# Altium PCB PWM_Controller_Half_Bridge_ONLY_TL494.PcbDoc
Units mm, origin at the board's own origin, x right, y up, seen from the top; angles counter-clockwise.
Board outline 55.25 x 27.25 mm, 2 copper layers (Top Layer, Bottom Layer), stack 1.071 mm thick; 44 components, 18 nets, 105 pads, 17 vias.
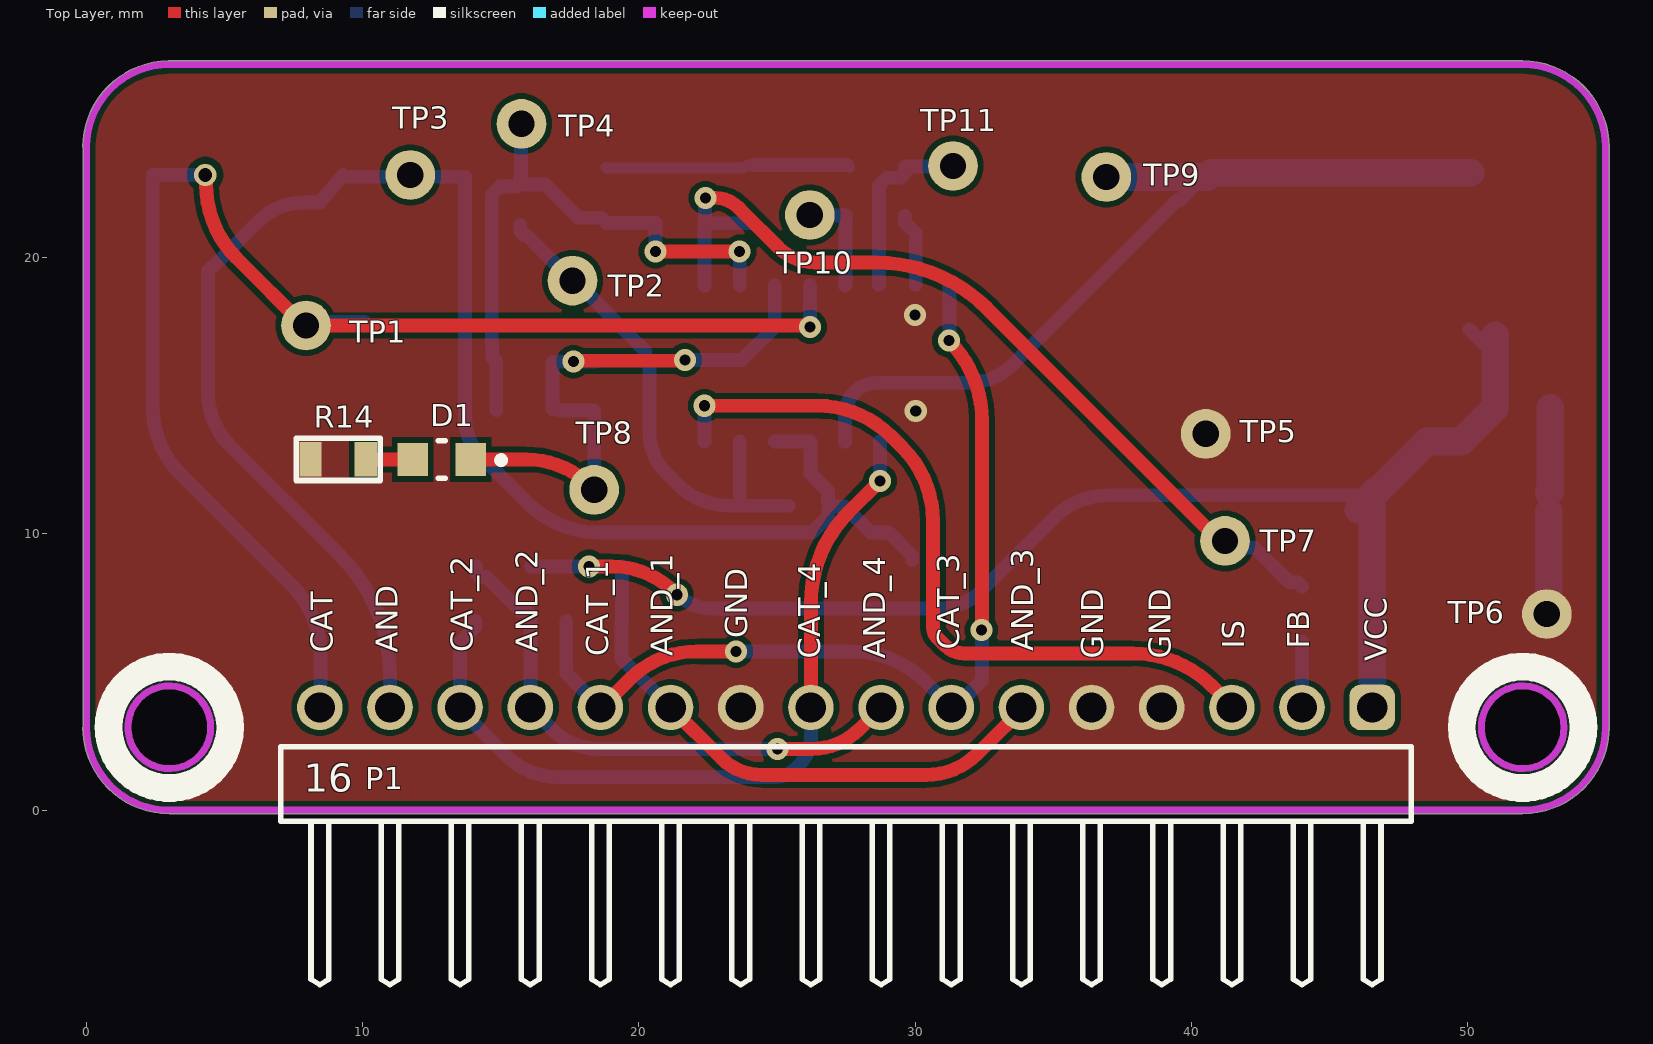
[diagram p0: Top Layer view]
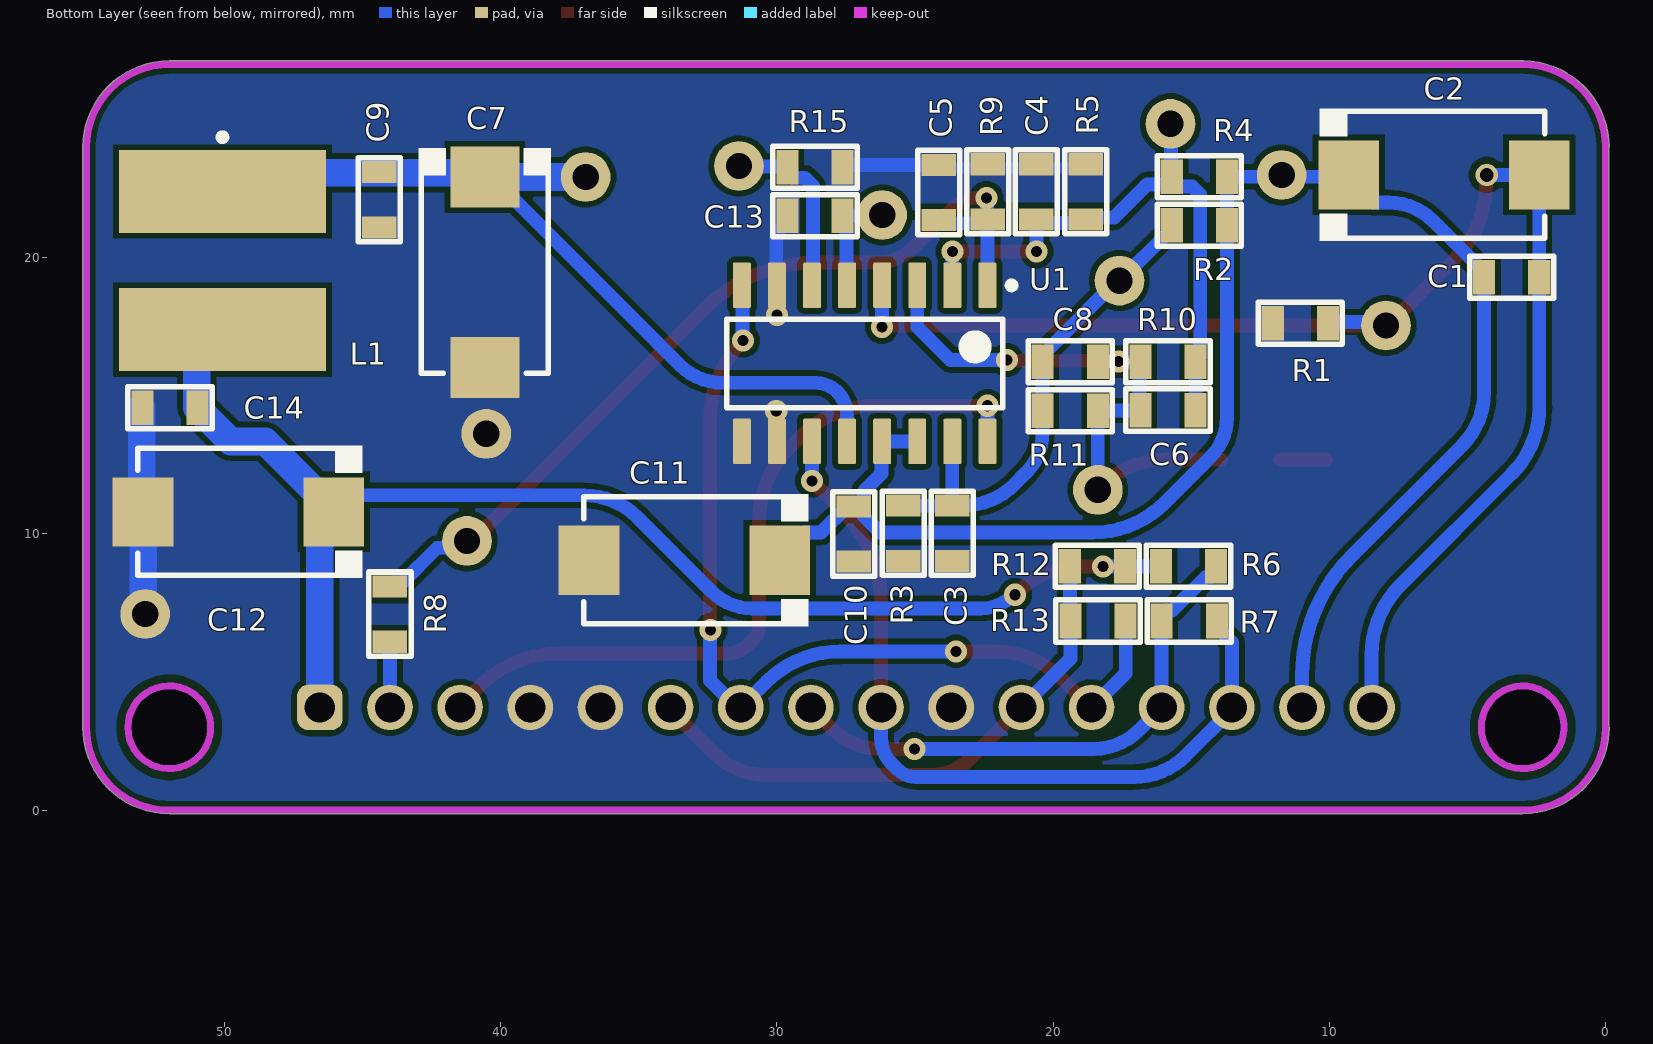
[diagram p1: Bottom Layer view, seen from below]
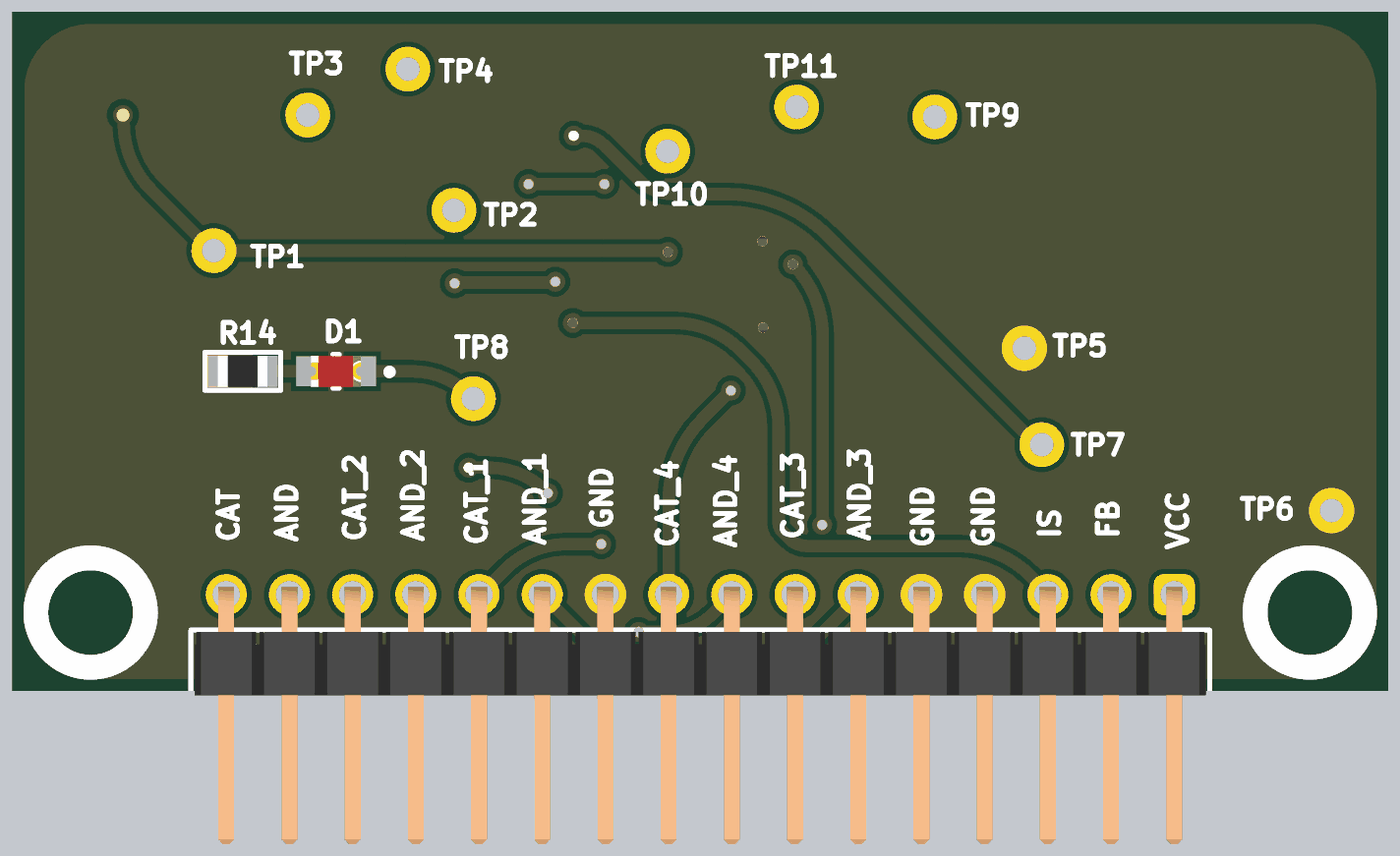
[diagram p2: 3D render of the assembled board from above, using the file's embedded part models]
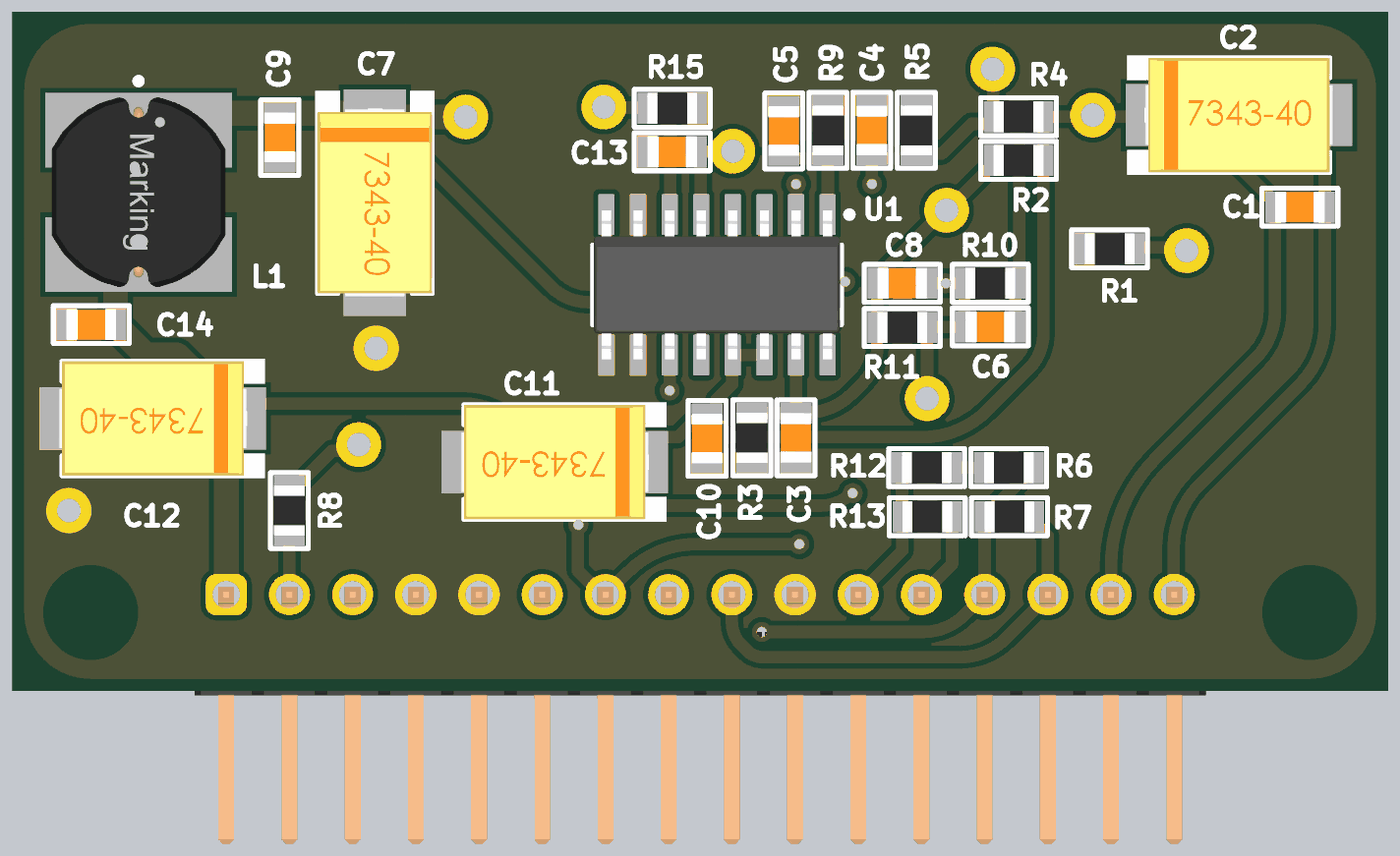
[diagram p3: 3D render of the assembled board from below, using the file's embedded part models]

## Layer stack, top to bottom
Top Solder: solder mask 0.0102, Solder Resist, Dk 3.5
Top Layer: signal copper 0.0356
Dielectric 1: dielectric 1, FR-4, Dk 4.8
Bottom Layer: signal copper 0.0356
Bottom Solder: solder mask 0.0102, Solder Resist, Dk 3.5

## Board outline
-0.122,3.038 -0.122,23.962 -0.127,24 cw(c3,24) 2.954,27.127 2.963,27.127 52,27.127 cw(c52,24) 55.127,24.001 55.127,24 55.127,3.05 55.127,3 cw(c52,3) 52.002,-0.127 52,-0.127 2.999,-0.127 2.997,-0.127 cw(c3,3)
cut-out: 50.5,3 ccw(c52,3) 52,1.5 ccw(c52,3) 53.5,3 ccw(c52,3) 52,4.5 ccw(c52,3)
cut-out: 1.5,3 ccw(c3,3) 3,1.5 ccw(c3,3) 4.5,3 ccw(c3,3) 3,4.5 ccw(c3,3)

## Design rules (kind name [scope] priority, off if disabled: settings)
Clearance Clearance_1 [All vs InNet('GND_1')] p1: gap=0.2 ignorepadtopadclearanceinfootprint=FALSE
Clearance [All vs InNet('GND')] p2: gap=0.2 ignorepadtopadclearanceinfootprint=FALSE except(0.4: Fill-Fill Fill-Poly Fill-Region Fill-Text Fill-Hole Poly-Poly Poly-Region Poly-Text Poly-Hole Region-Region Region-Text Region-Hole)
ComponentClearance [All] p1: gap=-3 collisioncheckmode=3 verticalgap=0.254 showdistances=FALSE
DiffPairsRouting [All] p1: maxlimit=0.254 minlimit=0.254 mostfreqgap=0.254 substack1={A23D90DD-733B-49C5-8102-56B3D284E3A0} toplayer_{a23d90dd-733b-49c5-8102-56b3d284e3a0}_minwidth=0.381 toplayer_{a23d90dd-733b-49c5-8102-56b3d284e3a0}_maxwidth=0.381 toplayer_{a23d90dd-733b-49c5-8102-56b3d284e3a0}_prefwidth=0.381 bottomlayer_{a23d90dd-733b-49c5-8102-56b3d284e3a0}_minwidth=0.381 bottomlayer_{a23d90dd-733b-49c5-8102-56b3d284e3a0}_maxwidth=0.381 bottomlayer_{a23d90dd-733b-49c5-8102-56b3d284e3a0}_prefwidth=0.381 toplayer_minwidth=0.381 toplayer_maxwidth=0.381 toplayer_prefwidth=0.381 bottomlayer_minwidth=0.381 bottomlayer_maxwidth=0.381 bottomlayer_prefwidth=0.381 substack2={0B3DB408-A969-412D-8C07-BA8AE97219D9} toplayer_{0b3db408-a969-412d-8c07-ba8ae97219d9}_minwidth=0.381 toplayer_{0b3db408-a969-412d-8c07-ba8ae97219d9}_maxwidth=0.381 toplayer_{0b3db408-a969-412d-8c07-ba8ae97219d9}_prefwidth=0.381 bottomlayer_{0b3db408-a969-412d-8c07-ba8ae97219d9}_minwidth=0.381 bottomlayer_{0b3db408-a969-412d-8c07-ba8ae97219d9}_maxwidth=0.381 bottomlayer_{0b3db408-a969-412d-8c07-ba8ae97219d9}_prefwidth=0.381 substack3={378827E6-B38F-4565-9D2F-710D8D441C30} toplayer_{378827e6-b38f-4565-9d2f-710d8d441c30}_minwidth=0.381 toplayer_{378827e6-b38f-4565-9d2f-710d8d441c30}_maxwidth=0.381 toplayer_{378827e6-b38f-4565-9d2f-710d8d441c30}_prefwidth=0.381 bottomlayer_{378827e6-b38f-4565-9d2f-710d8d441c30}_minwidth=0.381 bottomlayer_{378827e6-b38f-4565-9d2f-710d8d441c30}_maxwidth=0.381 bottomlayer_{378827e6-b38f-4565-9d2f-710d8d441c30}_prefwidth=0.381 substack4={1E65D4A7-266F-4925-B814-5E9C4A66F8EE} toplayer_{1e65d4a7-266f-4925-b814-5e9c4a66f8ee}_minwidth=0.381 toplayer_{1e65d4a7-266f-4925-b814-5e9c4a66f8ee}_maxwidth=0.381 toplayer_{1e65d4a7-266f-4925-b814-5e9c4a66f8ee}_prefwidth=0.381 bottomlayer_{1e65d4a7-266f-4925-b814-5e9c4a66f8ee}_minwidth=0.381 bottomlayer_{1e65d4a7-266f-4925-b814-5e9c4a66f8ee}_maxwidth=0.381 bottomlayer_{1e65d4a7-266f-4925-b814-5e9c4a66f8ee}_prefwidth=0.381 substack5={93C5D03E-862D-45F8-9871-970EEA9B3F11} toplayer_{93c5d03e-862d-45f8-9871-970eea9b3f11}_minwidth=0.381 toplayer_{93c5d03e-862d-45f8-9871-970eea9b3f11}_maxwidth=0.381 toplayer_{93c5d03e-862d-45f8-9871-970eea9b3f11}_prefwidth=0.381 bottomlayer_{93c5d03e-862d-45f8-9871-970eea9b3f11}_minwidth=0.381 bottomlayer_{93c5d03e-862d-45f8-9871-970eea9b3f11}_maxwidth=0.381 bottomlayer_{93c5d03e-862d-45f8-9871-970eea9b3f11}_prefwidth=0.381 maxuncoupledlength=12.7
Height [All] p1: minheight=0 maxheight=50 prefheight=33
HoleSize [All] p1: absolutevalues=TRUE maxlimit=6 minlimit=0.01 maxpercent=80.000 minpercent=20.000
HoleToHoleClearance [All] p1: gap=0.1 allowstackedmicrovias=TRUE
MinimumSolderMaskSliver [All] p1: minsoldermaskwidth=0.1
PlaneClearance [All] p1: clearance=0.7
PlaneConnect [All] p1: planeconnectstyle=Direct reliefexpansion=0.5 reliefentries=4 reliefconductorwidth=0.5 reliefairgap=0.15
PolygonConnect VQFN20 [HasFootprint('VQFN20')] p1: connectstyle=Direct reliefconductorwidth=0.254 reliefentries=4 polygonreliefangle="90 Angle" airgapwidth=0.254
PolygonConnect [All] p2: connectstyle=Direct reliefconductorwidth=0.3 reliefentries=4 polygonreliefangle="90 Angle" airgapwidth=0.15
RoutingVias [All] p1: holewidth=0.1 width=0.1 viastyle="Through Hole" minholewidth=0 minwidth=0.3 maxholewidth=2 maxwidth=4
ShortCircuit [All] p1: allowed=TRUE
SilkToSolderMaskClearance [IsPad] p1: minsilkscreentomaskgap=0.1 clearancetoexposedcopper=TRUE
SolderMaskExpansion SolderMaskExpansion_Via [IsVia] p1: expansion=0.102 istentingtop=TRUE
SolderMaskExpansion [All] p2: expansion=0.01 istentingtop=FALSE
UnRoutedNet [All] p1: checkbadconnections=TRUE
Width [All] p1: maxlimit=5 minlimit=0.2 preferedwidth=0.3 substack1={A23D90DD-733B-49C5-8102-56B3D284E3A0} substack2={0B3DB408-A969-412D-8C07-BA8AE97219D9} substack3={378827E6-B38F-4565-9D2F-710D8D441C30} substack4={1E65D4A7-266F-4925-B814-5E9C4A66F8EE} substack5={93C5D03E-862D-45F8-9871-970EEA9B3F11}
19 further rules are at their usual default settings.

## Components (designator, comment, footprint, x,y, rotation, side; value= is the part's Value field where it differs from the comment)
C1 "CAP-NON-POLAR" CAP-0805 3.4,19.3 r0 bottom
C2 "CAP-POLAR" CAP-TAN-D 5.85,23 r180 bottom
C3 "CAP-NON-POLAR" CAP-0805 23.656,10.025 r90 bottom
C4 "CAP-NON-POLAR" CAP-0805 20.612,22.387 r270 bottom
C5 "CAP-NON-POLAR" CAP-0805 24.143,22.362 r270 bottom
C6 "2.2nF 16V" CAP-0805 15.84,14.488 r180 bottom
C7 "CAP-POLAR" CAP-TAN-D 40.575,19.475 r270 bottom
C8 "2.2nF 16V" CAP-0805 19.383,16.235 r0 bottom
C9 "0.1uF" CAP-0805 44.4,22.1 r90 bottom
C10 "0.1uF" CAP-0805 27.225,10 r90 bottom
C11 "CAP-POLAR" CAP-TAN-D 33.35,9.05 r0 bottom
C12 "CAP-POLAR" CAP-TAN-D 49.5,10.8 r0 bottom
C13 "2.2nF 16V" CAP-0805 28.625,21.525 r180 bottom
C14 "0.1uF" CAP-0805 51.975,14.575 r180 bottom
D1 "RED" LED_RED 12.863,12.699 r180 top
L1 "47µH, 1.17A" WE-PD2_7850 50.075,19.9 r270 bottom
P1 "61301611021" 61301611021 27.5,0.95 r0 top locked
R1 "10K" RES-0805 11.05,17.625 r0 bottom
R2 "2K**" RES-0805 14.708,21.182 r0 bottom
R3 "2K" RES-0805 25.425,10.025 r270 bottom
R4 "10K**" RES-0805 14.708,22.932 r0 bottom
R5 "2K" RES-0805 18.818,22.387 r90 bottom
R6 "3K" RES-0805 15.1,8.825 r0 bottom
R7 "1K" RES-0805 15.075,6.85 r0 bottom
R8 "2K" RES-0805 44.01,7.1 r90 bottom
R9 "2K" RES-0805 22.368,22.387 r90 bottom
R10 "1M" RES-0805 15.84,16.241 r0 bottom
R11 "1M" RES-0805 19.383,14.458 r180 bottom
R12 "3K" RES-0805 18.4,8.825 r180 bottom
R13 "1K" RES-0805 18.375,6.85 r0 bottom
R14 "330" RES-0805 9.113,12.699 r0 top
R15 "10K" RES-0805 28.625,23.275 r180 bottom
TP1 "" Test_Point 7.95,17.55 r0 top
TP2 "" Test_Point 17.6,19.172 r0 top
TP3 "" Test_Point 11.725,23 r0 top
TP4 "" Test_Point 15.75,24.85 r0 top
TP5 "" Test_Point 40.525,13.625 r0 top
TP6 "" Test_Point 52.875,7.1 r0 top
TP7 "" Test_Point 41.225,9.75 r0 top
TP8 "" Test_Point 18.383,11.6 r0 top
TP9 "" Test_Point 36.925,22.925 r0 top
TP10 "" Test_Point 26.19,21.548 r0 top
TP11 "" Test_Point 31.375,23.325 r0 top
U1 "TL494" SOIC-16-M 26.825,16.175 r270 bottom

## Footprints (in the part's own frame and the unit in brackets; to place one, negate y for a bottom-side part, rotate by r counter-clockwise, add the part's x,y. Pads: shape width x height; smd on the part's side, far side on the other; paste and mask are expansions set on the pad)
61301611021 [mm] "Pin Header, pitch 2.54 mm, THT, Angled, single row, 16p"
  rrect50% 1.65x1.65 hole 1.1: 1(19.05,2.77)
  round 1.65 hole 1.1: 2(16.51,2.77) 3(13.97,2.77) 4(11.43,2.77) 5(8.89,2.77) 6(6.35,2.77) 7(3.81,2.77) 8(1.27,2.77) 9(-1.27,2.77) 10(-3.81,2.77) 11(-6.35,2.77) 12(-8.89,2.77) 13(-11.43,2.77) 14(-13.97,2.77) 15(-16.51,2.77) 16(-19.05,2.77)
  silkscreen extent -20.47,-7.27 20.47,1.35, body extent -20.32,-7.27 20.32,3.09, height 2.58
CAP-0805 [mm]
  rect 0.8x1.25 smd mask+0.015: 1(-1,0) 2(1,0)
  silkscreen extent -1.52,-0.76 1.52,0.76, body extent -1,-0.62 1,0.63, height 0.8
CAP-TAN-D [mm]
  rect 2.2x2.5 smd: 1(-3.45,0) 2(3.45,0)
  silkscreen extent -4.5,-2.4 3.65,2.4, body extent -3.8,-2.3 3.8,2.3, height 4
LED_RED [mm]
  rect 1.1x1.2 smd paste+0 mask+0: 1(-1.05,0) 2(1.05,0)
  silkscreen extent -2.28,-0.67 0.13,0.67, body extent -1,-0.63 1,0.63, height 0.8
RES-0805 [mm]
  rect 0.8x1.25 smd mask+0.015: 1(-1,0) 2(1,0)
  silkscreen extent -1.52,-0.76 1.52,0.76, body extent -1,-0.62 1,0.63, height 0.6
SOIC-16-M [mm]
  rrect15% 1.65x0.65 smd: 1(-2.825,4.445) 2(-2.825,3.175) 3(-2.825,1.905) 4(-2.825,0.635) 5(-2.825,-0.635) 6(-2.825,-1.905) 7(-2.825,-3.175) 8(-2.825,-4.445) 9(2.825,-4.445) 10(2.825,-3.175) 11(2.825,-1.905) 12(2.825,-0.635) 13(2.825,0.635) 14(2.825,1.905) 15(2.825,3.175) 16(2.825,4.445)
  silkscreen extent -2.95,-5 1.6,5.44, body extent -3,-4.95 3,4.95, height 1.59
Test_Point [mm]
  round 1.8 hole 0.95: 1(0,0)
WE-PD2_7850 [mm] "SMD Power Inductor, 2-Leads, body 7.8x7mm"
  rect 3x7.5 smd: 1(-2.5,0) 2(2.5,0)
  silkscreen extent -4.59,-0.13 -4.34,0.12, body extent -3.81,-3.5 3.81,3.5, height 4.95

## Part data
C6 C8 C9 C10 C13 C14: library part CAP-NON-POLAR
D1: library part LED, "WURTH ELEKTRONIK - 151031YS06000 - LED, Yellow, Through Hole, T-1 (3mm), 30 mA, 2 V, 590 nm", Manufacturer_Name="Wurth Elektronik", Manufacturer_Part_Number=151031YS06000, Mouser Part Number=710-151031YS06000, Datasheet Link=https://katalog.we-online.de/led/datasheet/151031YS06000.pdf, Geometry.Height=5.5mm, Mouser Price/Stock=https://www.mouser.co.uk/ProductDetail/Wurth-Elektronik/151031YS06000?qs=LlUlMxKIyB3xSYYW%252BcuBiQ%3D%3D
L1: library part 744775147, "WE-PD2 SMT Power Inductor, size 7850, 47µH, 1.17A, 0.18Ω", Case/Size Code=7850, DC Resistance=0.134Ω, DC Resistance Max=0.18Ω, Inductance=47µH, Manufacturer="Wurth Elektronik", Operating Temperature Max=125°C, Operating Temperature Min=-40°C, Rated Current=1.17A, Saturation Current=1.24A, Self Resonant Frequency=12MHz, Category="Unshielded Power Inductors", ComponentLink1Description="Website Link", ComponentLink1URL=https://www.we-online.com/redexpert/article/744775147?ad, ComponentLink2Description="Datasheet Link", ComponentLink2URL=https://www.we-online.com/redexpert/spec/744775147?ad, Height=4.95mm, Length=7.8mm, Manufacturer Part Number=744775147, Match Code=WE-PD2, Mount="Surface Mount", Packaging="Tape and Reel", Width=7mm
P1: "WR-PHD Pin Header, THT, Angled, pitch 2.54mm, 1 Row, 16P", Contact Resistance=20mΩ, Manufacturer="Wurth Elektronik", Operating Temperature Max=105°C, Operating Temperature Min=-40°C, Rated Current=3A, Withstanding Voltage=500V, Working Voltage=250V, Category="Board-to-Board Connectors", ComponentLink1Description="Website Link", ComponentLink1URL=https://www.we-online.com/redexpert/article/61301611021?ad, ComponentLink2Description="Datasheet Link", ComponentLink2URL=https://www.we-online.com/redexpert/spec/61301611021?ad, Gender="Pin Header", Manufacturer Part Number=61301611021, Match Code=WR-PHD, Mount="Through Hole", Number of Pins=16, Number of Rows=1, Orientation=Angled, Packaging=Bag, Pitch=2.54mm
R1 R3 R5 R6 R7 R8 R9 R10 R11 R12 R13 R14 R15: library part RES-CONST
R2: library part RES-CONST, "2K"
R4: library part RES-CONST, "10K"
TP1 TP2 TP3 TP4 TP5 TP6 TP7 TP8 TP9 TP10 TP11: library part TP_PCB?, "Test_Point"
U1: "TL494 Pwm controller"

## Via types
v1: diameter 0.8, hole 0.4, Top Layer to Bottom Layer, tented both sides, 16 vias
v2: diameter 0.8, hole 0.5, Top Layer to Bottom Layer, tented both sides, 1 vias

## Nets (pads, with @x,y where several pads share a name; then routed paths per layer and width w, separated by ;. In a path a pad name is that pad's centre, name@x,y a point inside that pad or via, vN(x,y) a via of type N, cw(c..) or ccw(c..) an arc to the next point about the centre after c; other vN are vias at no path point)
+12: C12.1 C14.2 L1.2 P1.1 R6.2 R12.2 | length 50.3
  Top Layer w0.5: v1(18.193,8.825) 19.018,8.825 cw(c19.018,5.609) 21.292,7.883 v1(21.375,7.8)
  Bottom Layer w0.5: R6.2 R12.2 v1(18.193,8.825) ; v1@21.425,7.8 v1(21.375,7.8) 21.664,7.601 ccw(c22.632,9.007) 22.632,7.3 22.717,7.3 30.876,7.3 30.877,7.3 ccw(c30.877,9.407) 32.369,7.919 35.047,10.597 cw(c36.984,8.661) 36.984,11.4 36.986,11.4 C12.1@45.95,11.4 ; C12.1@46.05,10.95 C12.1 46.2,10.65 C12.1@46.55,10.3 ; L1.2 L1.2@50.95,16.525
  Bottom Layer w1: C12.1@46.05,10.875 46.363,11.188 46.363,11.263 46.65,11.55 46.725,11.55 48.525,13.35 49.775,13.35 51,14.575 L1.2@51,17.2 ; P1.1 46.55,10.3 C12.1@46.55,11
GND: C3.1 C4.1 C5.1 C7.2 C9.1 C10.1 C11.2 C12.2 C13.1 C14.1 P1.4 P1.5 P1.10 R1.2 R3.2 R5.2 R9.2 R14.1 R15.2 TP5.1 TP6.1 U1.7 U1.9 U1.10 | length 18.4
  Bottom Layer w0.4: R5.2@18.82,23.262 18.832,23.25 23.814,23.25 23.927,23.362 C5.1 ; R15.2@27.538,23.362 R15.2
  Bottom Layer w0.5: C5.1 R15.2@27.538,23.362 ; C13.1 29.625,21.3 30.025,20.9 U1.7@30.025,19.025
  Bottom Layer w1: TP6.1@52.95,7.1 C12.2 ; C12.2@52.95,11.5 53,11.55 C14.1@53,14.575
  other v1: 30.025,14.458 30,17.925
NetC1_1: C1.1 C2.2 P1.16 R1.1 TP1.1 U1.4 | length 52
  Top Layer w0.5: v2@4.329,22.971 4.329,22.664 ccw(c8.123,22.667) 5.441,19.984 5.443,19.982 7.875,17.55 26.146,17.55 v1(26.201,17.495)
  Bottom Layer w0.5: v2(4.3,23) C2.2 2.4,14.587 ccw(c5.805,14.585) 3.394,12.181 ccw(c5.805,14.585) 3.395,12.18 7.421,8.154 cw(c4.872,5.607) 8.475,5.611 P1.16@8.475,3.745 ; TP1.1@8.043,17.675 R1.1@10.068,17.675 ; U1.4 26.196,18.994 26.196,17.501 v1(26.201,17.495)
NetC1_2: C1.2 C2.1 C10.2 C11.1 P1.15 R2.1 R4.1 TP3.1 U1.13 U1.14 | length 61.1
  Bottom Layer w0.5: P1.15 10.99,4.854 ccw(c4.807,4.849) 9.178,9.222 5.186,13.214 cw(c7.109,15.122) 4.4,15.123 C1.2 4.4,19.525 4.55,19.675 4.585,19.675 6.24,21.33 cw(c7.855,19.718) 7.855,22 8.45,22 C2.1 9.368,22.932 R4.1 R2.1 13.708,14.209 13.708,14.207 ccw(c15.688,14.207) 14.288,12.807 14.289,12.805 15.965,11.129 15.967,11.127 ccw(c18.568,13.728) 18.568,10.05 18.57,10.05 26.275,10.05 26.85,10.625 26.85,10.85 C10.2@27,11 ; U1.14 U1.13 26.211,13.329 26.211,12.189 26.85,11.55 26.85,11.15 C10.2@27,11 ; C11.1 29.9,9.2 29.05,10.05 28.4,10.05 27.45,11 C10.2@27,11
NetC3_2: C3.2 C8.2 R2.2 R3.1 R11.1 TP2.1 U1.15 | length 18.3
  Bottom Layer w0.5: R2.2 15.708,20.957 15.858,20.807 15.943,20.807 17.525,19.225 17.63,19.225 20.233,16.622 20.233,16.385 C8.2 20.383,14.083 20.383,13.678 ccw(c22.469,13.68) 20.994,12.205 20.996,12.202 21.398,11.801 21.399,11.8 ccw(c23.269,13.67) 23.267,11.025 23.281,11.025 C3.2 ; U1.15 23.653,13.347 23.653,11.028 C3.2 ; R3.1 C3.2
NetC4_2: C4.2 C6.2 R4.2 R5.1 R10.1 TP4.1 U1.2 | length 21.9
  Top Layer w0.5: v1(20.6,20.225) v1(23.65,20.225)
  Bottom Layer w0.5: C6.2 R10.1 14.69,16.39 14.69,16.893 14.675,16.908 14.675,22.293 14.968,22.586 15.558,22.586 15.708,22.736 R4.2 15.729,22.953 15.729,24.829 TP4.1 ; R4.2@15.858,22.65 16.6,22.65 17.798,21.452 18.63,21.452 18.82,21.262 20.614,21.262 20.607,21.255 20.607,20.232 v1(20.6,20.225) ; U1.2 v1(23.65,20.225)
NetC5_2: C5.2 R8.2 R9.1 TP7.1 U1.1 | length 32
  Top Layer w0.5: v1(22.412,22.17) 22.753,22.17 cw(c22.753,20.963) 23.607,21.817 23.756,21.668 25.031,20.393 25.033,20.391 ccw(c26.399,21.757) 26.399,19.825 26.401,19.825 28.608,19.825 cw(c28.608,14.171) 32.605,18.17 41.025,9.75 TP7.1
  Bottom Layer w0.5: U1.1 22.375,19.005 R9.1@22.375,21.257 ; v1(22.412,22.17) 22.39,22.149 22.39,21.282 22.37,21.262 R9.1@22.375,21.257 ; C5.2@24.145,21.237 24.132,21.25 22.382,21.25 R9.1@22.375,21.257 ; TP7.1 41.474,9.501 42.299,9.501 43.55,8.25 43.86,8.25 R8.2
NetC6_1: C6.1 C8.1 D1.1 R10.2 R11.2 TP8.1 U1.3 | length 21.2
  Top Layer w0.5: D1.1 15.931,12.699 cw(c15.931,9.432) 18.241,11.742 TP8.1 ; v1(17.632,16.238) 17.663,16.269 21.644,16.269 v1(21.675,16.3)
  Bottom Layer w0.5: C6.1@16.875,14.523 R10.2@16.875,16.206 ; C6.1@17.108,14.488 17.123,14.473 18.368,14.473 R11.2 TP8.1 ; R10.2@17.108,16.24 17.11,16.238 v1(17.632,16.238) 18.38,16.238 C8.1 ; v1(21.675,16.3) 23.725,16.3 24.92,17.495 U1.3
NetC7_1: C7.1 C9.2 L1.1 TP9.1 U1.12 | length 30.6
  Bottom Layer w0.5: U1.12 27.46,13.925 27.46,14.274 cw(c28.697,14.273) 27.824,15.149 cw(c28.176,14.794) 27.829,15.154 27.847,15.171 cw(c28.608,14.363) 28.608,15.473 28.61,15.473 31.96,15.473 31.962,15.473 ccw(c31.963,17.672) 33.519,16.119 39.475,22.075 39.575,22.075 40.325,22.825 C7.1@40.325,22.925
  Bottom Layer w1: TP9.1 39.564,22.925 39.989,22.925 C7.1 ; C7.1@40.725,23.075 44.4,23.075 L1.1@50.125,23.075
NetC13_2: C13.2 TP10.1 U1.5 | length 4
  Bottom Layer w0.5: TP10.1@26.025,21.57 26.047,21.548 TP10.1 26.201,21.536 27.489,21.536 27.5,21.525 27.48,21.505 27.48,19.02 U1.5
NetD1_2: D1.2 R14.2 | length 1.7
  Top Layer w0.5: R14.2 D1.2@11.768,12.699
NetP1_2: P1.2 R8.1 | length 2.4
  Bottom Layer w0.5: P1.2 R8.1
NetP1_3: P1.3 U1.16 | length 27.6
  Top Layer w0.5: v1(22.38,14.643) 26.459,14.643 26.46,14.643 cw(c26.465,10.872) 29.125,13.545 29.563,13.107 cw(c26.914,10.473) 30.65,10.476 30.65,6.605 ccw(c31.15,6.607) 30.795,6.255 31.09,5.96 31.092,5.958 ccw(c31.778,6.648) 31.777,5.675 37.875,5.675 37.878,5.675 cw(c37.875,1.57) 40.778,4.473 P1.3@41.456,3.795
  Bottom Layer w0.5: U1.16 v1(22.38,14.643)
NetP1_6: P1.6 P1.11 R12.1 R13.2 | length 20.4
  Top Layer w0.5: P1.11 22.984,1.886 22.987,1.883 ccw(c24.455,3.352) 24.455,1.275 24.457,1.275 29.894,1.275 ; 29.894,1.275 29.896,1.275 30.393,1.275 30.395,1.275 ccw(c30.395,3.925) 32.27,2.053 32.623,2.405 33.85,3.632 P1.6
  Bottom Layer w0.5: R12.1 19.388,8.813 19.388,6.862 R13.2 19.375,5.495 P1.11
NetP1_7: P1.7 P1.12 R13.1 U1.8 | length 34
  Top Layer w0.5: P1.12@18.645,3.72 19.66,4.735 cw(c22.111,2.284) 22.111,5.75 v1(23.52,5.75) ; v1(31.225,17) 31.228,16.997 cw(c28.328,14.103) 32.425,14.103 32.425,14.101 32.425,6.55 v1(32.4,6.525)
  Bottom Layer w0.5: R13.1 17.375,4.955 P1.12 P1.12@18.61,3.54 ; v1(23.52,5.75) 27.693,5.75 27.696,5.75 cw(c27.695,1.924) 30.399,4.631 P1.7 31.632,3.924 ccw(c31.364,4.346) 31.716,3.991 31.718,3.993 32.425,4.7 32.425,6.5 v1(32.4,6.525) ; v1(31.225,17) 31.247,17.022 31.247,18.977 U1.8
NetP1_8: P1.8 P1.13 R6.1 R7.2 | length 19.9
  Top Layer w0.5: v1(25.024,2.22) 26.262,2.22 26.263,2.22 ccw(c26.263,4.651) 27.982,2.932 P1.8
  Bottom Layer w0.5: R6.1 14.1,8.6 14.25,8.45 14.475,8.45 15.7,7.225 15.925,7.225 16.075,7.075 R7.2 16.073,6.847 16.073,3.722 P1.13 16.895,2.895 ccw(c18.527,4.53) 18.527,2.22 18.528,2.22 v1(25.024,2.22)
NetP1_9: P1.9 P1.14 R7.1 U1.11 | length 29.4
  Top Layer w0.5: P1.9 26.23,7.487 26.23,7.488 cw(c30.905,7.488) 27.601,10.796 v1(28.73,11.925)
  Bottom Layer w0.5: R7.1 14.075,6.625 13.53,6.08 13.53,3.645 15.199,1.976 15.201,1.974 ccw(c17.068,3.842) 17.068,1.201 24.971,1.201 ccw(c24.97,2.146) 25.638,1.478 25.839,1.678 ccw(c24.898,2.621) 26.23,2.621 P1.9 ; v1(28.73,11.925) U1.11
NetR15_1: R15.1 TP11.1 U1.6 | length 6.7
  Bottom Layer w0.5: U1.6@28.7,19.03 28.7,22.608 28.993,22.9 29.475,22.9 29.625,23.05 R15.1 29.65,23.3 31.35,23.3 TP11.1

## Polygon pours and split planes (outlines as drawn)
GND on Top Layer "NONET_L-01_P-001" (solid, pour order 1): -0.075,0 0,0.075 0,27.127 55.127,27.127 55.127,0.006
GND on Bottom Layer "NONET_L-01_P-001" (solid, pour order 0): -0.075,0 0,0.075 0,27.127 55.127,27.127 55.127,0.006

## Keep-outs
Keep-Out Layer:
  circle w0.254: c52,3 r1.5
  circle w0.254: c3,3 r1.5
  lines w0.254: 0,3 ccw(c3,3) 3,0 ; 0,24 cw(c3,24) 3,27 ; 0.006,3 0.006,24.144 ; 2.963,27 52,27 cw(c52,24) 55,24 55,3.05 ; 2.999,0 52,0 ccw(c52,3) 55,3

## Silkscreen, mask and mechanical layers (free items; w line width, h text height)
Top Overlay:
  circle w1: c52,3 r2.2
  circle w1: c3,3 r2.2
  text "GND" at 23.921,6.229 h0.8 r90
  text "IS" at 41.926,5.851 h0.8 r90
  text "FB" at 44.276,5.851 h0.8 r90
  text "CAT_3" at 31.598,5.803 h0.8 r90
  text "AND_3" at 34.288,5.749 h0.8 r90
  text "CAT_2" at 13.991,5.726 h0.8 r90
  text "AND_2" at 16.341,5.726 h0.8 r90
  text "CAT" at 8.921,5.704 h0.8 r90
  text "AND" at 11.271,5.704 h0.8 r90
  text "CAT_1" at 18.885,5.576 h0.8 r90
  text "AND_1" at 21.235,5.576 h0.8 r90
  text "CAT_4" at 26.562,5.476 h0.8 r90
  text "AND_4" at 28.912,5.476 h0.8 r90
  text "GND" at 36.821,5.476 h0.8 r90
  text "GND" at 39.259,5.476 h0.8 r90
  text "VCC" at 47.071,5.396 h0.8 r90

## Text inside footprints (layer, text, board x,y; h text height)
P1: Top Overlay "16" at 7.867,0.675 h1.02